# Altium PCB ESP_Link.PcbDoc
Units mil, origin at the board's own origin, x right, y up, seen from the top; angles counter-clockwise.
Board outline 1290 x 690 mil, 2 copper layers (Top Layer, Bottom Layer); 25 components, 19 nets, 95 pads, 27 vias.
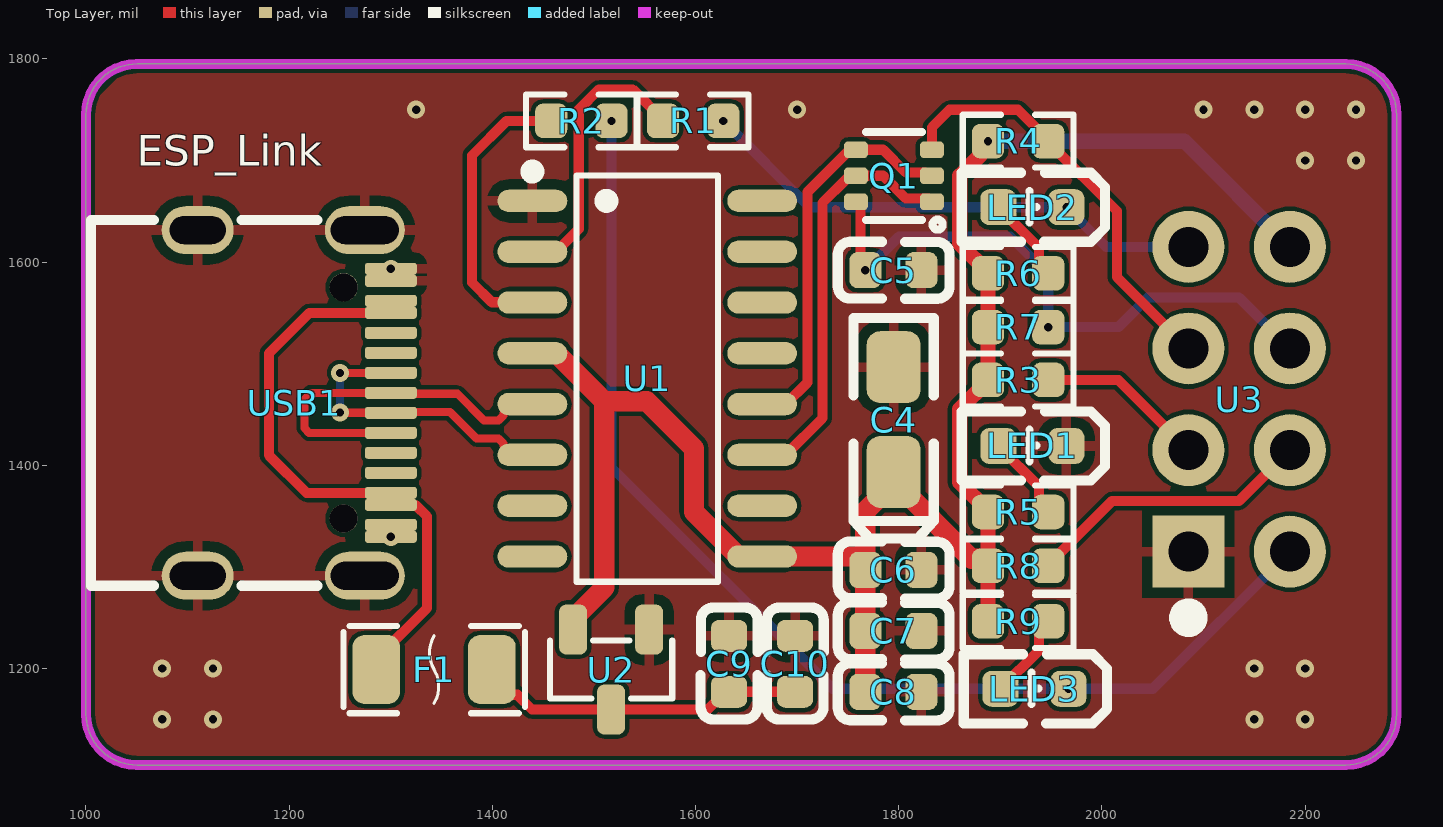
[diagram p0: Top Layer view]
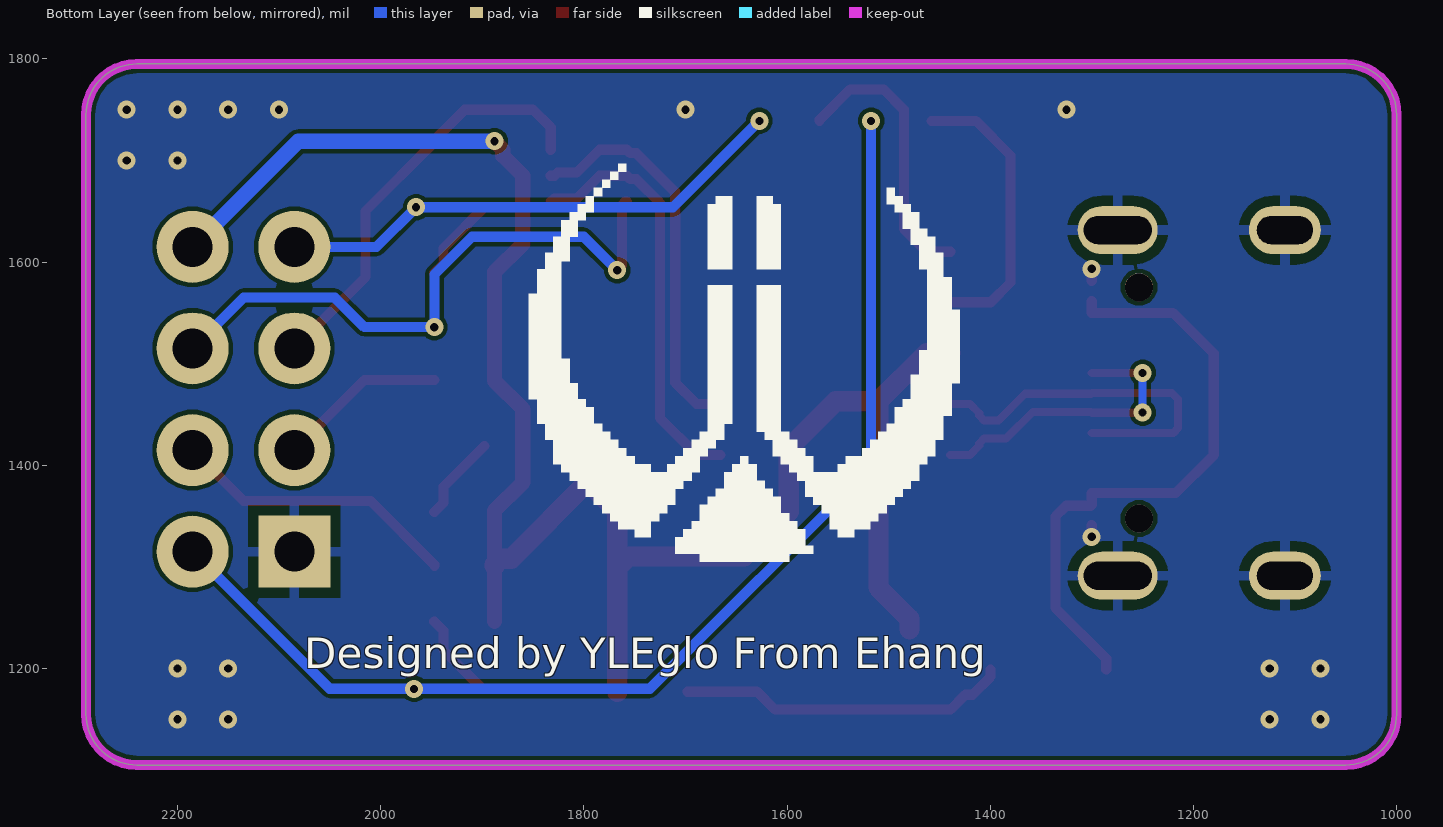
[diagram p1: Bottom Layer view, seen from below]
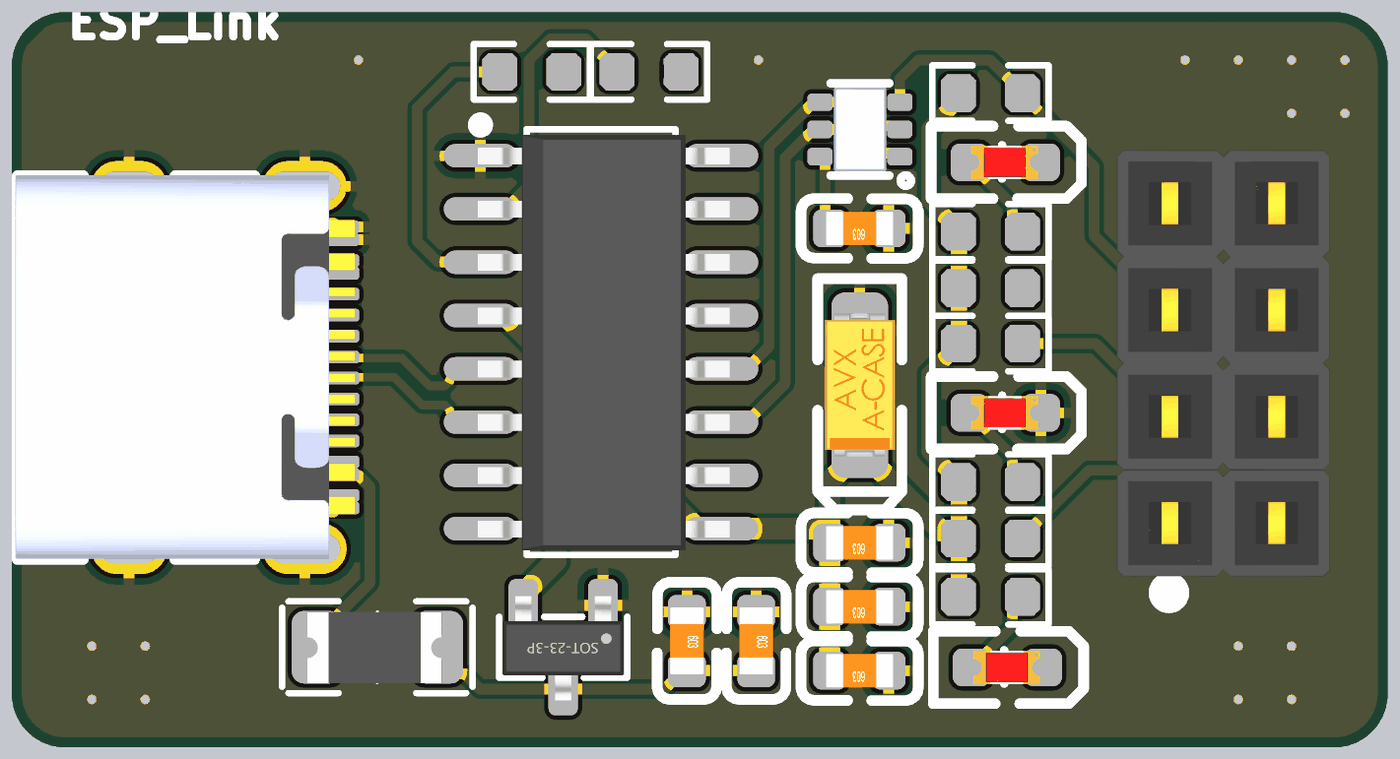
[diagram p2: 3D render of the assembled board from above, using the file's embedded part models]

## Layer stack, top to bottom
Top Solder: solder mask 0.4, Solder Resist, Dk 3.5
Top Layer: signal copper 1.4
Dielectric 1: dielectric 12.6, FR-4, Dk 4.8
Bottom Layer: signal copper 1.4
Bottom Solder: solder mask 0.4, Solder Resist, Dk 3.5

## Board outline
1000,1155 1000,1745 cw(c1050,1745) 1050,1795 2240,1795 cw(c2240,1745) 2290,1745 2290,1155 cw(c2240,1155) 2240,1105 1050,1105 cw(c1050,1155)

## Design rules (kind name [scope] priority, off if disabled: settings)
Clearance [All] p1: gap=4 ignorepadtopadclearanceinfootprint=FALSE
DiffPairsRouting [All] p1: maxlimit=10 minlimit=8 mostfreqgap=10 toplayer_minwidth=4 toplayer_maxwidth=15 toplayer_prefwidth=8 bottomlayer_minwidth=4 bottomlayer_maxwidth=15 bottomlayer_prefwidth=8 maxuncoupledlength=500
HoleSize [All] p1: absolutevalues=TRUE maxlimit=248.03 minlimit=8 maxpercent=80.000 minpercent=20.000
HoleToHoleClearance [All] p1: gap=4 allowstackedmicrovias=TRUE
MinimumSolderMaskSliver [All] p1: minsoldermaskwidth=0
PolygonConnect [All] p1: thpad.connectstyle=Relief thpad.reliefconductorwidth=10 thpad.reliefentries=4 thpad.polygonreliefangle="90 Angle" thpad.airgapwidth=10 smdpad.connectstyle=Relief smdpad.reliefconductorwidth=10 smdpad.reliefentries=4 smdpad.polygonreliefangle="90 Angle" smdpad.airgapwidth=10 via.connectstyle=Direct via.reliefconductorwidth=10 via.reliefentries=4 via.polygonreliefangle="90 Angle" via.airgapwidth=10
RoutingVias [All] p1: holewidth=8.27 width=18.11 viastyle="Through Hole" minholewidth=8 minwidth=18 maxholewidth=24 maxwidth=40
SilkToSilkClearance [All] p1: silktosilkclearance=0
SilkToSolderMaskClearance [IsPad] p1: minsilkscreentomaskgap=0 clearancetoexposedcopper=TRUE
SolderMaskExpansion [All] p1: expansion=4 istentingtop=FALSE
Width USB [InNetClass('USB')] p1: maxlimit=100 minlimit=4 preferedwidth=8
Width PWR [InNetClass('PWR')] p2: maxlimit=100 minlimit=10 preferedwidth=20
Width GND [InNetClass('GND')] p3: maxlimit=100 minlimit=10 preferedwidth=20
Width [InNetClass('All Nets')] p4: maxlimit=100 minlimit=10 preferedwidth=20
24 further rules are at their usual default settings.

## Classes and differential pairs
net class USB: USB_N USB_P
net class GND: GND
net class PWR: 3V3 USBVCC VCC5V
differential pair USB: +USB_P -USB_N

## Components (designator, comment, footprint, x,y, rotation, side; value= is the part's Value field where it differs from the comment)
C4 "10uF 16V" 3216TantalumCap 1795,1445 r270 top
C5 "100nF" C0603 1795,1590 r180 top
C6 "22uF" C0603 1795,1295 r180 top
C7 "1uF" C0603 1795,1235 r180 top
C8 "100nF" C0603 1795,1175 r180 top
C9 "22uF" C0603 1635,1205 r270 top
C10 "1uF" C0603 1700,1205 r270 top
F1 "ASMD1206-050" ASMD1206-050 1340,1200 r180 top
LED1 "LED" LED_0603 1930,1420 r180 top
LED2 "LED" LED_0603 1930,1655 r180 top
LED3 "LED" LED_0603 1932,1181 r180 top
Q1 "UMH3N" UMH3N 1795,1685 r0 top
R1 "120R" R0603 1595,1740 r0 top
R2 "120R" R0603 1485,1740 r0 top
R3 "10K" R0603 1915,1485 r0 top
R4 "10K" R0603 1915,1720 r0 top
R5 "1K" R0603 1915,1355 r0 top
R6 "1K" R0603 1915,1590 r0 top
R7 "10K" R0603 1920,1535 r180 top
R8 "10K" R0603 1920,1300 r180 top
R9 "1K" R0603 1915,1247.33 r0 top
U1 "CH340C" CH340C 1555,1490 r270 top
U2 "662K" 662K 1515,1200 r90 top
U3 "ESP-01S" ESP-01S-NoSlik 1769.05,1452.4 r180 top
USB1 "TYPE-C-KH Female_LieDown_16P" "TYPE-C-KH Female_LieDown_16P" 1150,1460 r270 top

## Footprints (in the part's own frame and the unit in brackets; to place one, negate y for a bottom-side part, rotate by r counter-clockwise, add the part's x,y. Pads: shape width x height; smd on the part's side, far side on the other; paste and mask are expansions set on the pad)
662K [mm] "线性稳压器LDO MaxIN: 6V  OUT: 3.3V"
  rrect50% 1.25x0.7 smd: 1(0.974,-0.999) 2(0.974,0.901) 3(-1.026,-0.049)
  silkscreen extent -0.75,-1.57 0.7,1.48, body extent -1.3,-1.5 1.2,1.4, height 1.05
3216TantalumCap [mm] "3216钽电容"
  rrect50% 1.8x1.35 smd: 1(1.31,0) 2(-1.31,0)
  silkscreen extent -2.54,-1 2.97,1, body extent -1.7,-0.84 1.7,0.84, height 1.71
ASMD1206-050 [mil] "自恢复保险丝"
  rrect50% 46.85x68.03 smd: 1(-59.57,1.02) 2(54.21,1.02)
  silkscreen extent -92,-42 87,44, body extent -63,-32 63,35, height 22
C0603 [mm] "电容-0603"
  rrect50% 0.8x0.9 smd: 1(-0.691,-0.052) 2(0.708,-0.052)
  silkscreen extent -1.4,-0.76 1.4,0.66, body extent -0.8,-0.45 0.8,0.35, height 0.3
CH340C [mm]
  oval 0.56x1.745 smd: 1(-4.325,-2.937) 2(-3.055,-2.937) 3(-1.785,-2.937) 4(-0.515,-2.937) 5(0.755,-2.937) 6(2.025,-2.937) 7(3.295,-2.937) 8(4.565,-2.937) 9(4.565,2.808) 10(3.295,2.808) 11(2.025,2.808) 12(0.755,2.808) 13(-0.515,2.808) 14(-1.785,2.808) 15(-3.055,2.808) 16(-4.325,2.808)
  silkscreen extent -5.21,-3.09 5.2,1.71, body extent -4.82,-3 5.08,3, height 1.75
ESP-01S-NoSlik [mm]
  rect 1.8x1.8 hole 1: 1(-8.025,3.49)
  round 1.8 hole 1: 2(-8.025,0.95) 3(-8.025,-1.59) 4(-8.025,-4.13) 5(-10.565,3.49) 6(-10.565,0.95) 7(-10.565,-1.59) 8(-10.565,-4.13)
  silkscreen extent -8.26,4.91 -7.79,5.37, body extent -11.86,-5.41 -6.78,4.75, height 8.58
LED_0603 [mil] "LED"
  rrect50% 35.43x35.43 smd: 1(32,1) 2(-35,1)
  silkscreen extent -73,-33 68,35, body extent -32,-15 31,17, height 24
R0603 [mil] "电阻-0603"
  rrect50% 31.75x34.02 smd: 1(-27.12,-0.99) 2(32.19,-0.99)
  silkscreen extent -52,-27 57,25, body extent -29,-16 33,15, height 32
"TYPE-C-KH Female_LieDown_16P" [mm] "Type-C母座_卧贴_16P"
  oval 1.2x2 hole 0.7 slot 1.7 at 90 deg: 1(-4.357,3.162) 2(4.283,3.162)
  oval 1.2x1.8 hole 0.7 slot 1.4 at 90 deg: 3(-4.357,-1.018) 4(4.283,-1.018)
  rrect50% 0.3x1.3 smd: A1(-3.387,3.812) A4(-2.587,3.812) A5(-1.287,3.812) A6(-0.287,3.812) A7(0.213,3.812) A8(1.213,3.812) A9(2.513,3.812) A12(3.313,3.812) B1(3.013,3.812) B4(2.213,3.812) B5(1.713,3.812) B6(0.713,3.812) B7(-0.787,3.812) B8(-1.787,3.812) B9(-2.287,3.812) B12(-3.087,3.812)
  round 0.7 hole 0.7 unplated: ""(-2.927,2.632) ""(2.853,2.632)
  silkscreen extent -4.61,-3.68 4.53,1.97, body extent -4.62,-3.72 4.52,4.36, height 3.32
UMH3N [mm] "2个NPN预偏压式(双) 100mA 50V"
  rrect50% 0.6x0.42 smd: 1(0.955,-0.652) 2(0.955,-0.002) 3(0.955,0.648) 4(-0.945,0.648) 5(-0.945,-0.002) 6(-0.945,-0.652)
  silkscreen extent -0.69,-1.35 1.22,1.1, body extent -0.62,-1 0.64,1, height 0.95

## Part data
C4: library part 3216TantalumCap, "3216钽电容"
C5 C6 C7 C8 C9 C10: library part C0603, "电容-0603"
F1: "自恢复保险丝"
LED1 LED2 LED3: library part LED_0603
Q1: "2个NPN预偏压式(双) 100mA 50V"
R1 R2 R3 R4 R5 R6 R7 R8 R9: library part R0603, "电阻-0603"
U2: "线性稳压器LDO MaxIN: 6V  OUT: 3.3V"
U3: "ESP01S开发板"
USB1: "Type-C母座_卧贴_16P"

## Via types
v1: diameter 17.72, hole 8.2, Top Layer to Bottom Layer, tented both sides, 21 vias
v2: diameter 17.72, hole 8, Top Layer to Bottom Layer, tented both sides, 6 vias

## Nets (pads, with @x,y where several pads share a name; then routed paths per layer and width w, separated by ;. In a path a pad name is that pad's centre, name@x,y a point inside that pad or via, vN(x,y) a via of type N, cw(c..) or ccw(c..) an arc to the next point about the centre after c; other vN are vias at no path point)
3V3: C4.1 C6.2 C7.2 C8.2 R3.1 R4.1 R5.1 R6.1 R7.2 R8.2 R9.1 U1.4 U1.9 U2.2 U3.8 | length 1904.2
  Top Layer w15: R9.1 R5.1 1887.88,1355.38 1860,1383.25 1860,1455.24 1887.88,1483.11 R6.1 1887.88,1590.14 1860,1618.02 1860,1685 1879.77,1704.77 1879.77,1710.9 v1(1887.88,1719.01)
  Top Layer w20: U1.4 1462.68,1510.26 1510,1462.94 ; U2.2 1479.51,1249.17 1510,1279.66 1510,1462.94 ; C8.2 C7.2 C6.2 C6.2@1767.11,1299.01 ; C4.1 C4.1@1795,1384.57 ; R8.2 1887.81,1302.12 1881.94,1308 1871.57,1308 C4.1@1795,1384.57 ; 1510,1462.94 1552.06,1462.94 1598.41,1416.59 1598.41,1354.06 1642.21,1310.26 U1.9 1755.87,1310.26 C6.2@1767.11,1299.01 ; C6.2@1767.11,1299.01 1767.11,1354.9 1795,1382.79 C4.1@1795,1384.57
  Bottom Layer w15: v1(1887.88,1719.01) 2080.99,1719.01 U3.8
DTR: Q1.2 Q1.4 U1.12 | length 391.2
  Top Layer w10: U1.12 1688.86,1460.26 1710,1481.4 1710,1668.91 1748.33,1707.24 1754.54,1707.24 Q1.4 1784.62,1710.51 1806.94,1688.19 1825.8,1688.19 1829.07,1684.92 Q1.2
GND: C4.2 C5.1 C6.1 C7.1 C8.1 C9.1 C10.1 LED1.2 U1.1 U2.1 U3.1 USB1.1 USB1.2 USB1.3 USB1.4 USB1.A1 USB1.A12 USB1.B1 USB1.B12 | length 23.6
  Top Layer w10: v1(1300.09,1329.57) USB1.B1 ; USB1.B12 v1(1300.09,1593.35)
  other v1: 1075,1150 1125,1150 2150,1150 2200,1150 1075,1200 1125,1200 2150,1200 2200,1200 2200,1700 2250,1700 1325,1750 1700,1750 2100,1750 2150,1750 2200,1750 2250,1750
IO0: Q1.3 R4.2 U3.3 | length 418.5
  Top Layer w10: Q1.3 1832.62,1732.62 1850,1750 1917.33,1750 1947.19,1720.14 R4.2 1947.19,1717.88 2014.8,1650.26 2014.8,1585.2 U3.3
IO2: R3.2 U3.2 | length 166.4
  Top Layer w10: R3.2 2015.99,1484.01 U3.2
NetLED1_1: LED1.1 R5.2 | length 85.4
  Top Layer w10: LED1.1 1938.12,1378.88 1938.12,1363.07 R5.2
NetLED2_1: LED2.1 R6.2 | length 85.4
  Top Layer w10: LED2.1 1938.12,1613.88 1938.12,1598.07 R6.2
NetLED3_1: LED3.1 R9.2 | length 85.9
  Top Layer w10: LED3.1 1938.12,1218.12 1938.12,1237.28 R9.2
NetR1_1: R1.1 U1.2 | length 277
  Top Layer w10: U1.2 1462.68,1610.26 1485,1632.58 1485,1750 1505,1770 1538.02,1770 1567.88,1740.14 R1.1
NetR2_1: R2.1 U1.3 | length 284.5
  Top Layer w10: U1.3 1439.09,1560.52 1399.48,1560.52 1380,1580 1380,1705 1414.01,1739.01 R2.1
NetR8_1: R8.1 U3.6 | length 285.8
  Top Layer w10: R8.1 1947.12,1302.12 2010,1365 2135,1365 U3.6
nRST: C5.2 Q1.6 R7.1 U3.7 | length 603.5
  Top Layer w10: Q1.6 1759.19,1659.33 1762.46,1656.06 1762.46,1596.7 v1(1767.11,1592.05)
  Bottom Layer w10: v1(1767.11,1592.05) 1800.07,1625 1910,1625 1947.12,1587.88 v1(1947.12,1535.99) 2015.99,1535.99 2045,1565 2135,1565 U3.7
RTS: Q1.1 Q1.5 U1.11 | length 415.6
  Top Layer w10: U1.11 1688.86,1410.26 1725,1446.4 1725,1658.32 1748.33,1681.65 1754.54,1681.65 Q1.5 1784.62,1684.92 1806.94,1662.6 1829.35,1662.6 Q1.1
RXD: LED2.2 R1.2 U3.4 | length 509.2
  Bottom Layer w10: v2(1627.19,1739.01) 1712.19,1654 v2(1965,1654) 2004,1615 U3.4
TXD: LED3.2 R2.2 U3.5 | length 1155.1
  Bottom Layer w10: v2(1517.19,1739.01) 1517.19,1397.81 1735,1180 v2(1967,1180) 2050,1180 U3.5
USB_N: U1.6 USB1.A7 USB1.B7 | length 297.8
  Top Layer w8: v2(1250,1451.86) 1250.12,1451.74 1299.96,1451.74 USB1.A7 1300.92,1452.46 1358.16,1452.46 1384.36,1426.26 1406.09,1426.26 1410.78,1421.57 1410.78,1419.31 1419.82,1410.26 U1.6 ; v2(1250,1490.99) USB1.B7
  Bottom Layer w8: v2(1250,1451.86) v2(1250,1490.99)
USB_P: U1.5 USB1.A6 USB1.B6 | length 361.5
  Top Layer w8: USB1.B6 1219.69,1431.93 1215,1436.61 1215,1465 1221.3,1471.3 USB1.A6 1300.92,1470.46 1365.62,1470.46 1391.82,1444.26 1406.09,1444.26 1410.78,1448.95 1410.78,1451.21 1419.82,1460.26 U1.5
USBVCC: F1.2 USB1.A4 USB1.A9 USB1.B4 USB1.B9 | length 607.4
  Top Layer w10: F1.2 1285.79,1209.57 1335.68,1259.46 1335.68,1349.69 1325.22,1360.15 1300.98,1360.15 USB1.A9 USB1.B4 1217.12,1372.88 1180,1410 1180,1510 1220.04,1550.04 USB1.B9 USB1.A4
VCC5V: C9.2 C10.2 F1.1 U2.3 | length 326
  Top Layer w10: F1.1 1399.57,1192.03 1417.49,1174.11 1424.44,1174.11 1438.95,1159.61 U2.3 1611.92,1159.61 1629.43,1177.11 C9.2 C10.2
pads on no net: U1.7 U1.8 U1.10 U1.13 U1.14 U1.15 U1.16 USB1. USB1.A5 USB1.A8 USB1.B5 USB1.B8

## Polygon pours and split planes (outlines as drawn)
GND on Top Layer "GND_L01_P000" (solid, pour order 0): 1050,1800 1000,1750 1000,1145 1040,1105 2260,1105 2290,1135 2290,1755 2250,1795 2245,1795
GND on Bottom Layer "GND_L02_P001" (solid, pour order 1): 1050,1800 1000,1750 1000,1145 1040,1105 2260,1105 2290,1135 2290,1755 2250,1795 2245,1795

## Keep-outs
Keep-Out Layer:
  the board outline again, w10

## Silkscreen, mask and mechanical layers (free items; w line width, h text height)
Top Overlay:
  text "ESP_Link" at 1050,1695 h30
Bottom Overlay:
  drawing of 5 lines, arcs and shapes, not listed
  text "Designed by YLEglo From Ehang" at 2075,1200 h30